# Altium PCB Tag.PcbDoc
Units mm, origin at the board's own origin, x right, y up, seen from the top; angles counter-clockwise.
Board outline 60 x 45 mm, 2 copper layers (Top Layer, Bottom Layer); 2 components, 0 nets, 101 pads, 32 vias.
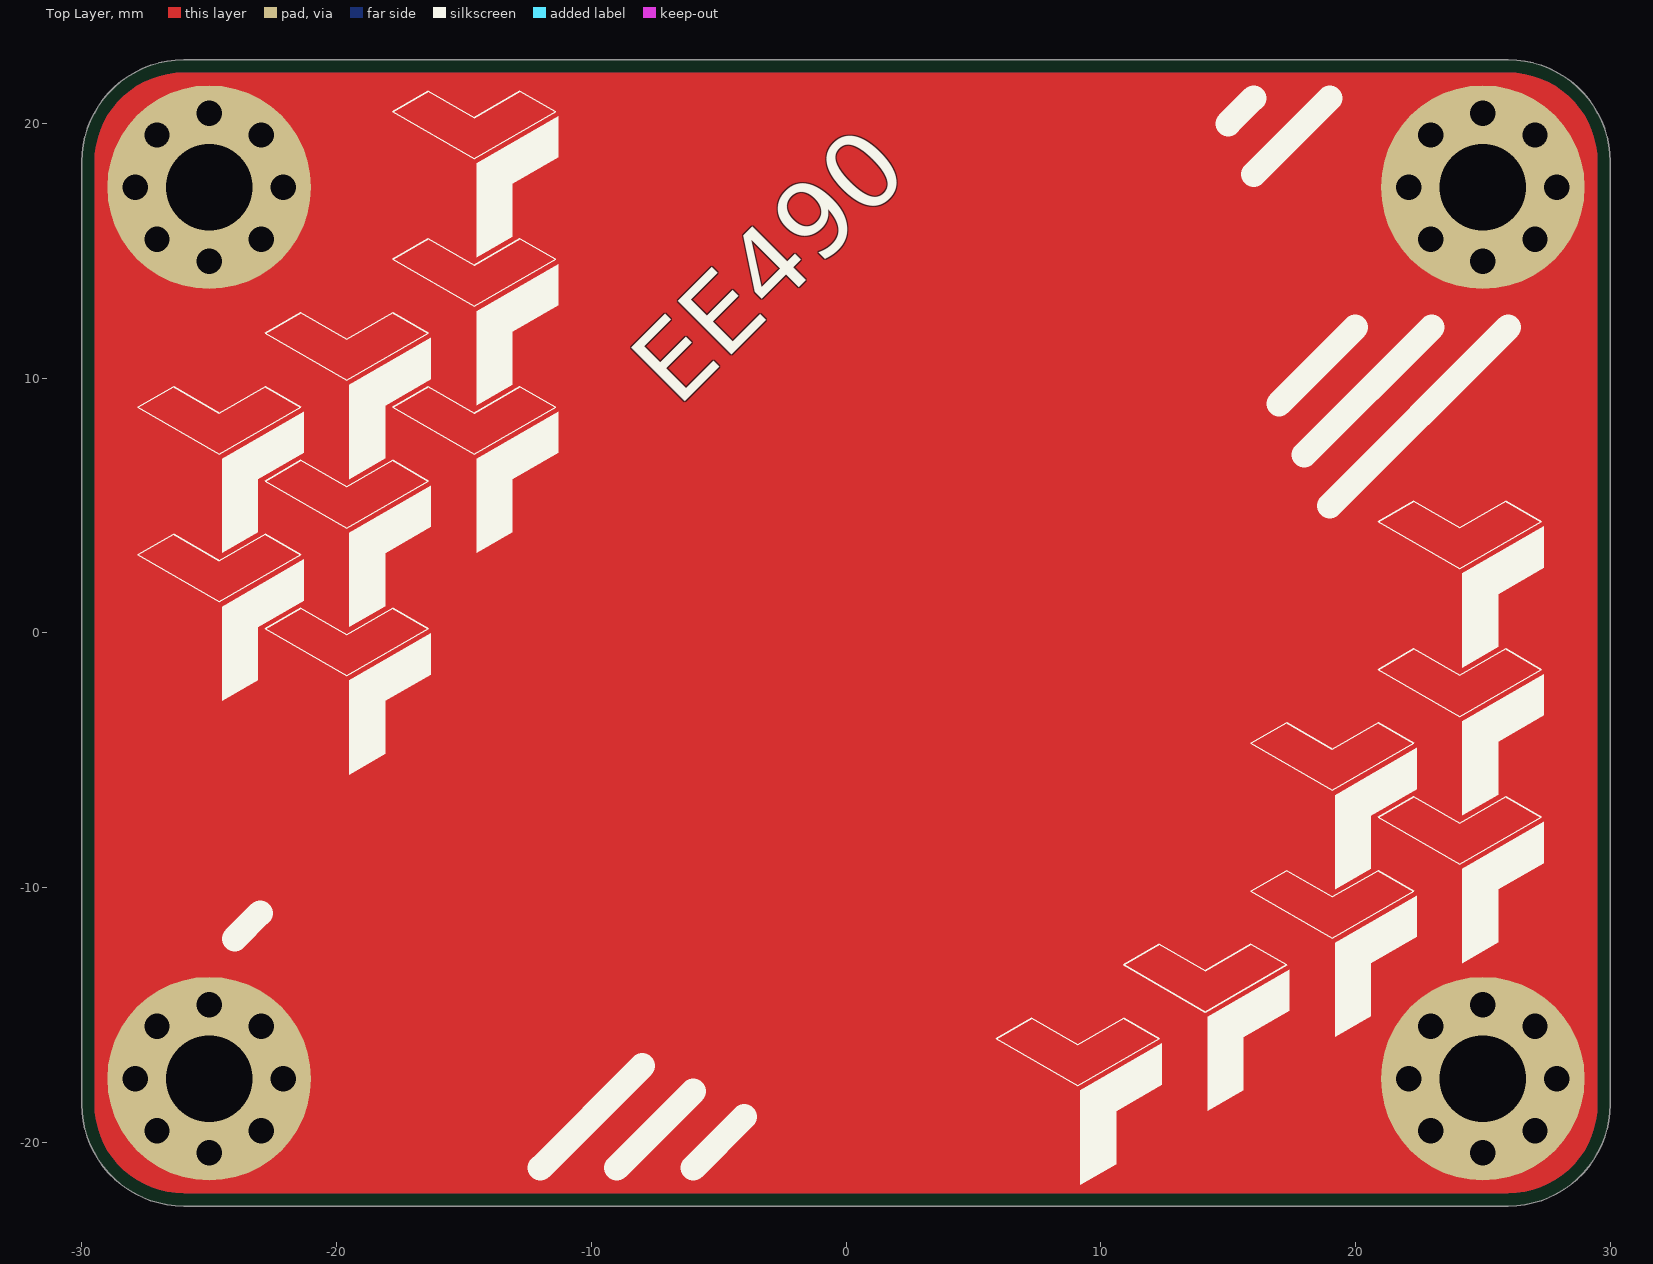
[diagram p0: Top Layer view]
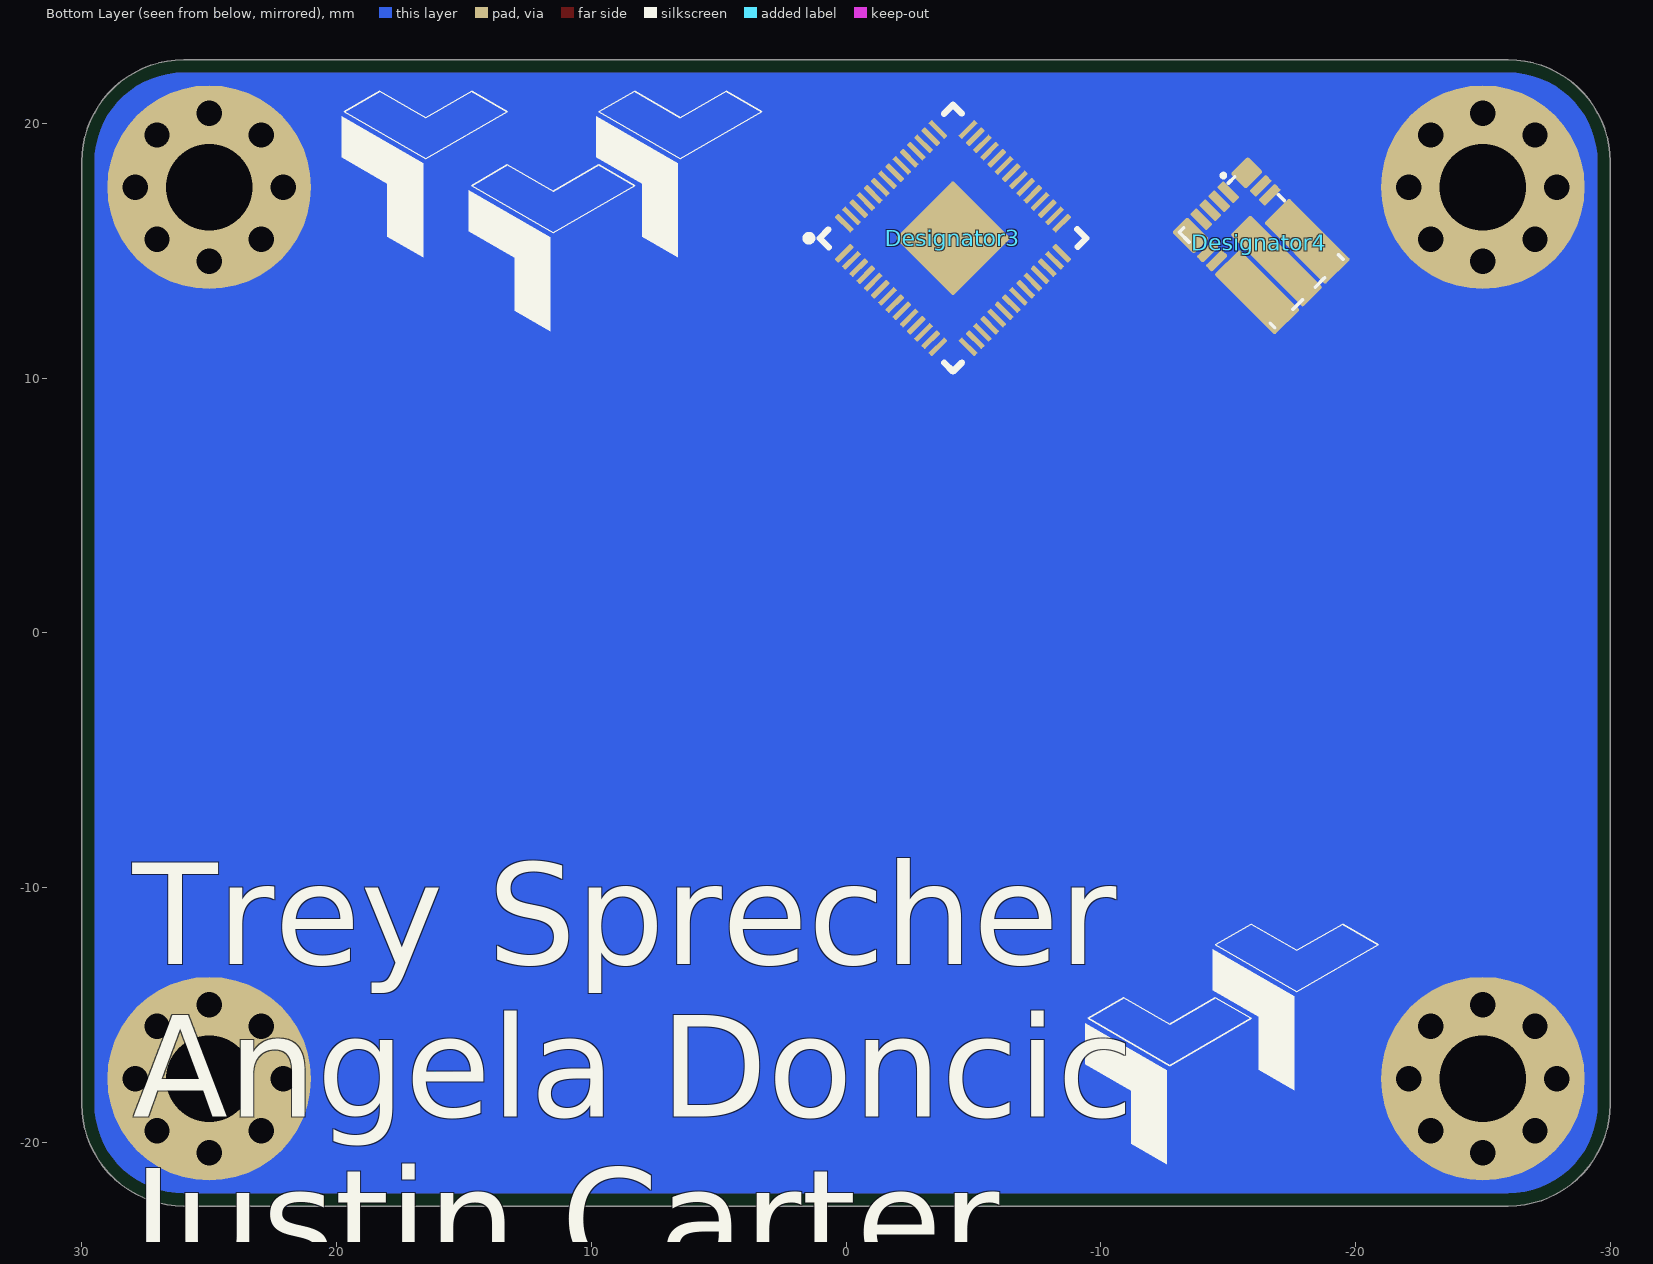
[diagram p1: Bottom Layer view, seen from below]

## Layer stack, top to bottom
Top Solder: solder mask 0.0102, Solder Resist, Dk 3.5
Top Layer: signal copper 0.0356
Dielectric 1: dielectric 0.32, FR-4, Dk 4.8
Bottom Layer: signal copper 0.0356
Bottom Solder: solder mask 0.0102, Solder Resist, Dk 3.5

## Board outline
-30,-18.5 -30,18.5 cw(c-26,18.5) -26,22.5 26,22.5 cw(c26,18.5) 30,18.5 30,-18.5 cw(c26,-18.5) 26,-22.5 -26,-22.5 cw(c-26,-18.5)

## Design rules (kind name [scope] priority, off if disabled: settings)
Clearance [All] p1: gap=0.254 ignorepadtopadclearanceinfootprint=FALSE except(0: Arc-Hole Track-Hole SMDPad-Hole THPad-Hole Via-Hole Fill-Hole Poly-Hole Region-Hole Text-Hole)
PolygonConnect [All] p1: connectstyle=Relief reliefconductorwidth=0.254 reliefentries=4 polygonreliefangle="90 Angle" airgapwidth=0.254
RoutingVias [All] p1: holewidth=0.711 width=1.27 viastyle="Through Hole" minholewidth=0.711 minwidth=1.27 maxholewidth=0.711 maxwidth=1.27
SolderMaskExpansion [All] p1: expansion=0.102 istentingtop=FALSE
Width [All] p1: maxlimit=0.254 minlimit=0.254 preferedwidth=0.254
30 further rules are at their usual default settings.

## Components (designator, comment, footprint, x,y, rotation, side; value= is the part's Value field where it differs from the comment)
Designator3 "Comment" QFN-56(7x7)_RASPBERRYPI -4.2,15.5 r135 bottom
Designator4 "Comment" QFN-13_EPC_EPC2310X -16.3,15.2 r225 bottom

## Footprints (in the part's own frame and the unit in brackets; to place one, negate y for a bottom-side part, rotate by r counter-clockwise, add the part's x,y. Pads: shape width x height; smd on the part's side, far side on the other; paste and mask are expansions set on the pad)
QFN-13_EPC_EPC2310X [mm]
  rrect30% 0.9x0.35 smd paste-1 mask-1: 1(-2.401,0.576) 2(-2.401,0.076) 3(-2.401,-0.424) 4(-2.401,-0.924)
  rrect20% 1.2x0.85 smd paste-1 mask-1: 5(-2.251,-1.674)
  rrect30% 0.35x0.9 smd paste-1 mask-1: 6(-1.326,-1.649) 7(-0.826,-1.649) 11(-1.176,1.651) 12(-1.676,1.651)
  rrect10% 3.35x1.395 smd paste-1 mask-1: 8(1.174,-1.401)
  rrect10% 4x1.1 smd paste-1 mask-1: 9(0.849,0.002)
  rrect10% 3.4x1.395 smd paste-1 mask-1: 10(1.149,1.403)
  rrect20% 0.85x0.95 smd paste-1 mask-1: 13(-2.426,1.626)
  rrect50% 0.52x0.3 on Bottom Solder paste-1 mask-1: ""(-2.303,0.576) ""(-2.303,-0.424) ""(-2.303,-0.924) ""(-2.303,0.076)
  rrect50% 0.535x0.3 on Bottom Solder paste-1 mask-1: ""(-2.301,1.426)
  rrect50% 0.3x0.535 on Bottom Solder paste-1 mask-1: ""(-2.176,1.544)
  rrect50% 0.888x0.3 on Bottom Solder paste-1 mask-1: ""(-2.12,-1.424)
  rrect50% 0.3x0.52 on Bottom Solder paste-1 mask-1: ""(-1.826,-1.549) ""(-1.676,1.551) ""(-1.326,-1.549) ""(-1.176,1.551) ""(-0.826,-1.549) ""(-0.326,1.551) ""(-0.326,-1.549) ""(0.174,-1.549) ""(0.174,1.551) ""(0.674,1.551) ""(0.674,-1.549) ""(1.174,-1.549) ""(1.174,1.551) ""(1.674,-1.549) ""(1.674,1.551) ""(2.174,-1.549) ""(2.174,1.551)
  rrect50% 3.405x0.48 on Bottom Solder paste-1 mask-1: ""(0.809,0.002)
  rrect50% 3x0.59 on Bottom Solder paste-1 mask-1: ""(1.023,-1.309) ""(1.023,1.311)
  silkscreen extent -3.05,-1.9 2.65,1.9, body extent -2.5,-1.75 2.5,1.75, height 0.56
QFN-56(7x7)_RASPBERRYPI [mm]
  rrect30% 0.875x0.2 smd paste-2539.97 mask+0: 1(-3.435,2.6) 2(-3.435,2.2) 3(-3.435,1.8) 4(-3.435,1.4) 5(-3.435,1) 6(-3.435,0.6) 7(-3.435,0.2) 8(-3.435,-0.2) 9(-3.435,-0.6) 10(-3.435,-1) 11(-3.435,-1.4) 12(-3.435,-1.8) 13(-3.435,-2.2) 14(-3.435,-2.6) 29(3.435,-2.6) 30(3.435,-2.2) 31(3.435,-1.8) 32(3.435,-1.4) 33(3.435,-1) 34(3.435,-0.6) 35(3.435,-0.2) 36(3.435,0.2) 37(3.435,0.6) 38(3.435,1) 39(3.435,1.4) 40(3.435,1.8) 41(3.435,2.2) 42(3.435,2.6)
  rrect30% 0.2x0.875 smd paste-2539.97 mask+0: 15(-2.6,-3.435) 16(-2.2,-3.435) 17(-1.8,-3.435) 18(-1.4,-3.435) 19(-1,-3.435) 20(-0.6,-3.435) 21(-0.2,-3.435) 22(0.2,-3.435) 23(0.6,-3.435) 24(1,-3.435) 25(1.4,-3.435) 26(1.8,-3.435) 27(2.2,-3.435) 28(2.6,-3.435) 43(2.6,3.435) 44(2.2,3.435) 45(1.8,3.435) 46(1.4,3.435) 47(1,3.435) 48(0.6,3.435) 49(0.2,3.435) 50(-0.2,3.435) 51(-0.6,3.435) 52(-1,3.435) 53(-1.4,3.435) 54(-1.8,3.435) 55(-2.2,3.435) 56(-2.6,3.435)
  rrect5% 3.2x3.2 smd paste-2539.97: 57(0,0)
  silkscreen extent -4.05,-3.7 3.7,4.05, body extent -3.5,-3.5 3.5,3.5, height 0.9

## Free pads (board coordinates)
  round 8 hole 3.4: 1(-25,-17.5) 1(-25,17.5) 1(25,-17.5) 1(25,17.5)

## Via types
v1: diameter 1.4, hole 1, Top Layer to Bottom Layer, 32 vias

## Nets (pads, with @x,y where several pads share a name; then routed paths per layer and width w, separated by ;. In a path a pad name is that pad's centre, name@x,y a point inside that pad or via, vN(x,y) a via of type N, cw(c..) or ccw(c..) an arc to the next point about the centre after c; other vN are vias at no path point)
pads on no net: Designator3.1 Designator3.2 Designator3.3 Designator3.4 Designator3.5 Designator3.6 Designator3.7 Designator3.8 Designator3.9 Designator3.10 Designator3.11 Designator3.12 Designator3.13 Designator3.14 Designator3.15 Designator3.16 Designator3.17 Designator3.18 Designator3.19 Designator3.20 Designator3.21 Designator3.22 Designator3.23 Designator3.24 Designator3.25 Designator3.26 Designator3.27 Designator3.28 Designator3.29 Designator3.30 Designator3.31 Designator3.32 Designator3.33 Designator3.34 Designator3.35 Designator3.36 Designator3.37 Designator3.38 Designator3.39 Designator3.40 Designator3.41 Designator3.42 Designator3.43 Designator3.44 Designator3.45 Designator3.46 Designator3.47 Designator3.48 Designator3.49 Designator3.50 Designator3.51 Designator3.52 Designator3.53 Designator3.54 Designator3.55 Designator3.56 Designator3.57 Designator4. Designator4.1 Designator4.2 Designator4.3 Designator4.4 Designator4.5 Designator4.6 Designator4.7 Designator4.8 Designator4.9 Designator4.10 Designator4.11 Designator4.12 Designator4.13
copper on no net:
  other v1: -25,-20.4 25,-20.4 -27.051,-19.551 -22.949,-19.551 22.949,-19.551 27.051,-19.551 -27.9,-17.5 -22.1,-17.5 22.1,-17.5 27.9,-17.5 -27.051,-15.449 -22.949,-15.449 22.949,-15.449 27.051,-15.449 -25,-14.6 25,-14.6 -25,14.6 25,14.6 -27.051,15.449 -22.949,15.449 22.949,15.449 27.051,15.449 -27.9,17.5 -22.1,17.5 22.1,17.5 27.9,17.5 -27.051,19.551 -22.949,19.551 22.949,19.551 27.051,19.551 -25,20.4 25,20.4

## Other copper
Top Layer:
  region: -29.5,-18.5 -29.5,18.5 cw(c-26,18.5) -26,22 26,22 cw(c26,18.5) 29.5,18.5 29.5,-18.5 cw(c26,-18.5) 26,-22 -26,-22 cw(c-26,-18.5)
Bottom Layer:
  region: -29.5,-18.5 -29.5,18.5 cw(c-26,18.5) -26,22 26,22 cw(c26,18.5) 29.5,18.5 29.5,-18.5 cw(c26,-18.5) 26,-22 -26,-22 cw(c-26,-18.5)

## Silkscreen, mask and mechanical layers (free items; w line width, h text height)
Top Overlay:
  drawing of 114 lines, arcs and shapes, not listed
  text "EE490" at -6.6,8.807 h3 r45
Bottom Overlay:
  region: -12.598,-20.857 -12.598,-17.162 -9.398,-15.315 -9.398,-16.931 -11.198,-17.971 -11.198,-20.049
  region: -17.598,-17.957 -17.598,-14.262 -14.398,-12.415 -14.398,-14.031 -16.198,-15.071 -16.198,-17.149
  region: 6.602,14.743 6.602,18.438 9.802,20.285 9.802,18.669 8.002,17.629 8.002,15.551
  region: 11.602,11.843 11.602,15.538 14.802,17.385 14.802,15.769 13.002,14.729 13.002,12.651
  region: 16.602,14.743 16.602,18.438 19.802,20.285 19.802,18.669 18.002,17.629 18.002,15.551
  lines w0.05: -20.902,-12.235 -19.502,-11.427 -17.702,-12.466 -15.902,-11.427 -14.502,-12.235 -17.702,-14.082 -20.902,-12.235 ; -15.902,-15.135 -14.502,-14.327 -12.702,-15.366 -10.902,-14.327 -9.502,-15.135 -12.702,-16.982 -15.902,-15.135 ; 3.298,20.465 4.698,21.273 6.498,20.234 8.298,21.273 9.698,20.465 6.498,18.618 3.298,20.465 ; 8.298,17.565 9.698,18.373 11.498,17.334 13.298,18.373 14.698,17.565 11.498,15.718 8.298,17.565 ; 13.298,20.465 14.698,21.273 16.498,20.234 18.298,21.273 19.698,20.465 16.498,18.618 13.298,20.465
  text "Trey Sprecher / Angela Doncic / Justin Carter" at 28,-25 h4
Top Solder:
  region: -16.105,6.029 -17.905,7.069 -17.905,8.685 -14.705,6.838 -14.705,3.143 -16.105,3.951
  region: -16.105,17.629 -17.905,18.669 -17.905,20.285 -14.705,18.438 -14.705,14.743 -16.105,15.551
  region: -16.105,11.829 -17.905,12.869 -17.905,14.485 -14.705,12.638 -14.705,8.943 -16.105,9.751
  region: 22.595,1.529 20.795,2.569 20.795,4.185 23.995,2.338 23.995,-1.357 22.595,-0.549
  region: 22.595,-4.271 20.795,-3.231 20.795,-1.615 23.995,-3.462 23.995,-7.157 22.595,-6.349
  region: 22.595,-10.071 20.795,-9.031 20.795,-7.415 23.995,-9.262 23.995,-12.957 22.595,-12.149
  region: 17.595,-7.171 15.795,-6.131 15.795,-4.515 18.995,-6.362 18.995,-10.057 17.595,-9.249
  region: 17.595,-12.971 15.795,-11.931 15.795,-10.315 18.995,-12.162 18.995,-15.857 17.595,-15.049
  region: 12.595,-15.871 10.795,-14.831 10.795,-13.215 13.995,-15.062 13.995,-18.757 12.595,-17.949
  region: 7.595,-18.771 5.795,-17.731 5.795,-16.115 8.995,-17.962 8.995,-21.657 7.595,-20.849
  region: -21.105,8.929 -22.905,9.969 -22.905,11.585 -19.705,9.738 -19.705,6.043 -21.105,6.851
  region: -26.105,6.029 -27.905,7.069 -27.905,8.685 -24.705,6.838 -24.705,3.143 -26.105,3.951
  region: -21.105,3.129 -22.905,4.169 -22.905,5.785 -19.705,3.938 -19.705,0.243 -21.105,1.051
  region: -26.105,0.229 -27.905,1.269 -27.905,2.885 -24.705,1.038 -24.705,-2.657 -26.105,-1.849
  region: -21.105,-2.671 -22.905,-1.631 -22.905,-0.015 -19.705,-1.862 -19.705,-5.557 -21.105,-4.749
  lines w0.5: -9,13 -1.2,20.8
  text "SUMMER / 2023" at -8.907,-33.92 h8 r45
Bottom Solder:
  region: -14.205,-17.971 -16.005,-16.931 -16.005,-15.315 -12.805,-17.162 -12.805,-20.857 -14.205,-20.049
  region: -19.205,-15.071 -21.005,-14.031 -21.005,-12.415 -17.805,-14.262 -17.805,-17.957 -19.205,-17.149
  region: 4.995,17.629 3.195,18.669 3.195,20.285 6.395,18.438 6.395,14.743 4.995,15.551
  region: 9.995,14.729 8.195,15.769 8.195,17.385 11.395,15.538 11.395,11.843 9.995,12.651
  region: 14.995,17.629 13.195,18.669 13.195,20.285 16.395,18.438 16.395,14.743 14.995,15.551
  lines w0.75: -28.7,-9.5 -21.5,-9.5 ; -28.7,-7.5 -22.5,-7.5 ; -28.7,-2 -23.7,-2 ; -28.7,0 -23.8,0 ; -28.7,6 -23.5,6 ; -28.7,8 -24.5,8 ; -0.8,-14.7 1,-14.7 3.6,-12.1 3.6,-3.8 2.9,-3.1 2.9,1.4 3.7,2.2 5.5,4 8.3,4 10.2,5.9 10.2,9.7 11.2,10.7 12,10.7 ; 27.5,-7.5 28.7,-7.5 ; 27.5,6 28.7,6 ; 27.5,8 28.7,8 ; 28.5,-9.5 28.7,-9.5 ; 28.5,-2 28.7,-2 ; 28.5,0 28.7,0
  text "TS3" at -22.4,10 h2
  text "Solar / Battery Charger" at 19.8,-19.9 h1.8
Drill Guide:
  drawing of 240 lines, arcs and shapes, not listed
Board Shape:
  the board outline again, w0.1
Mechanical 16:
  drawing of 40 lines, arcs and shapes, not listed